# EAGLE board OpenBook_PCB_v54 (EAGLE 9.7.0)
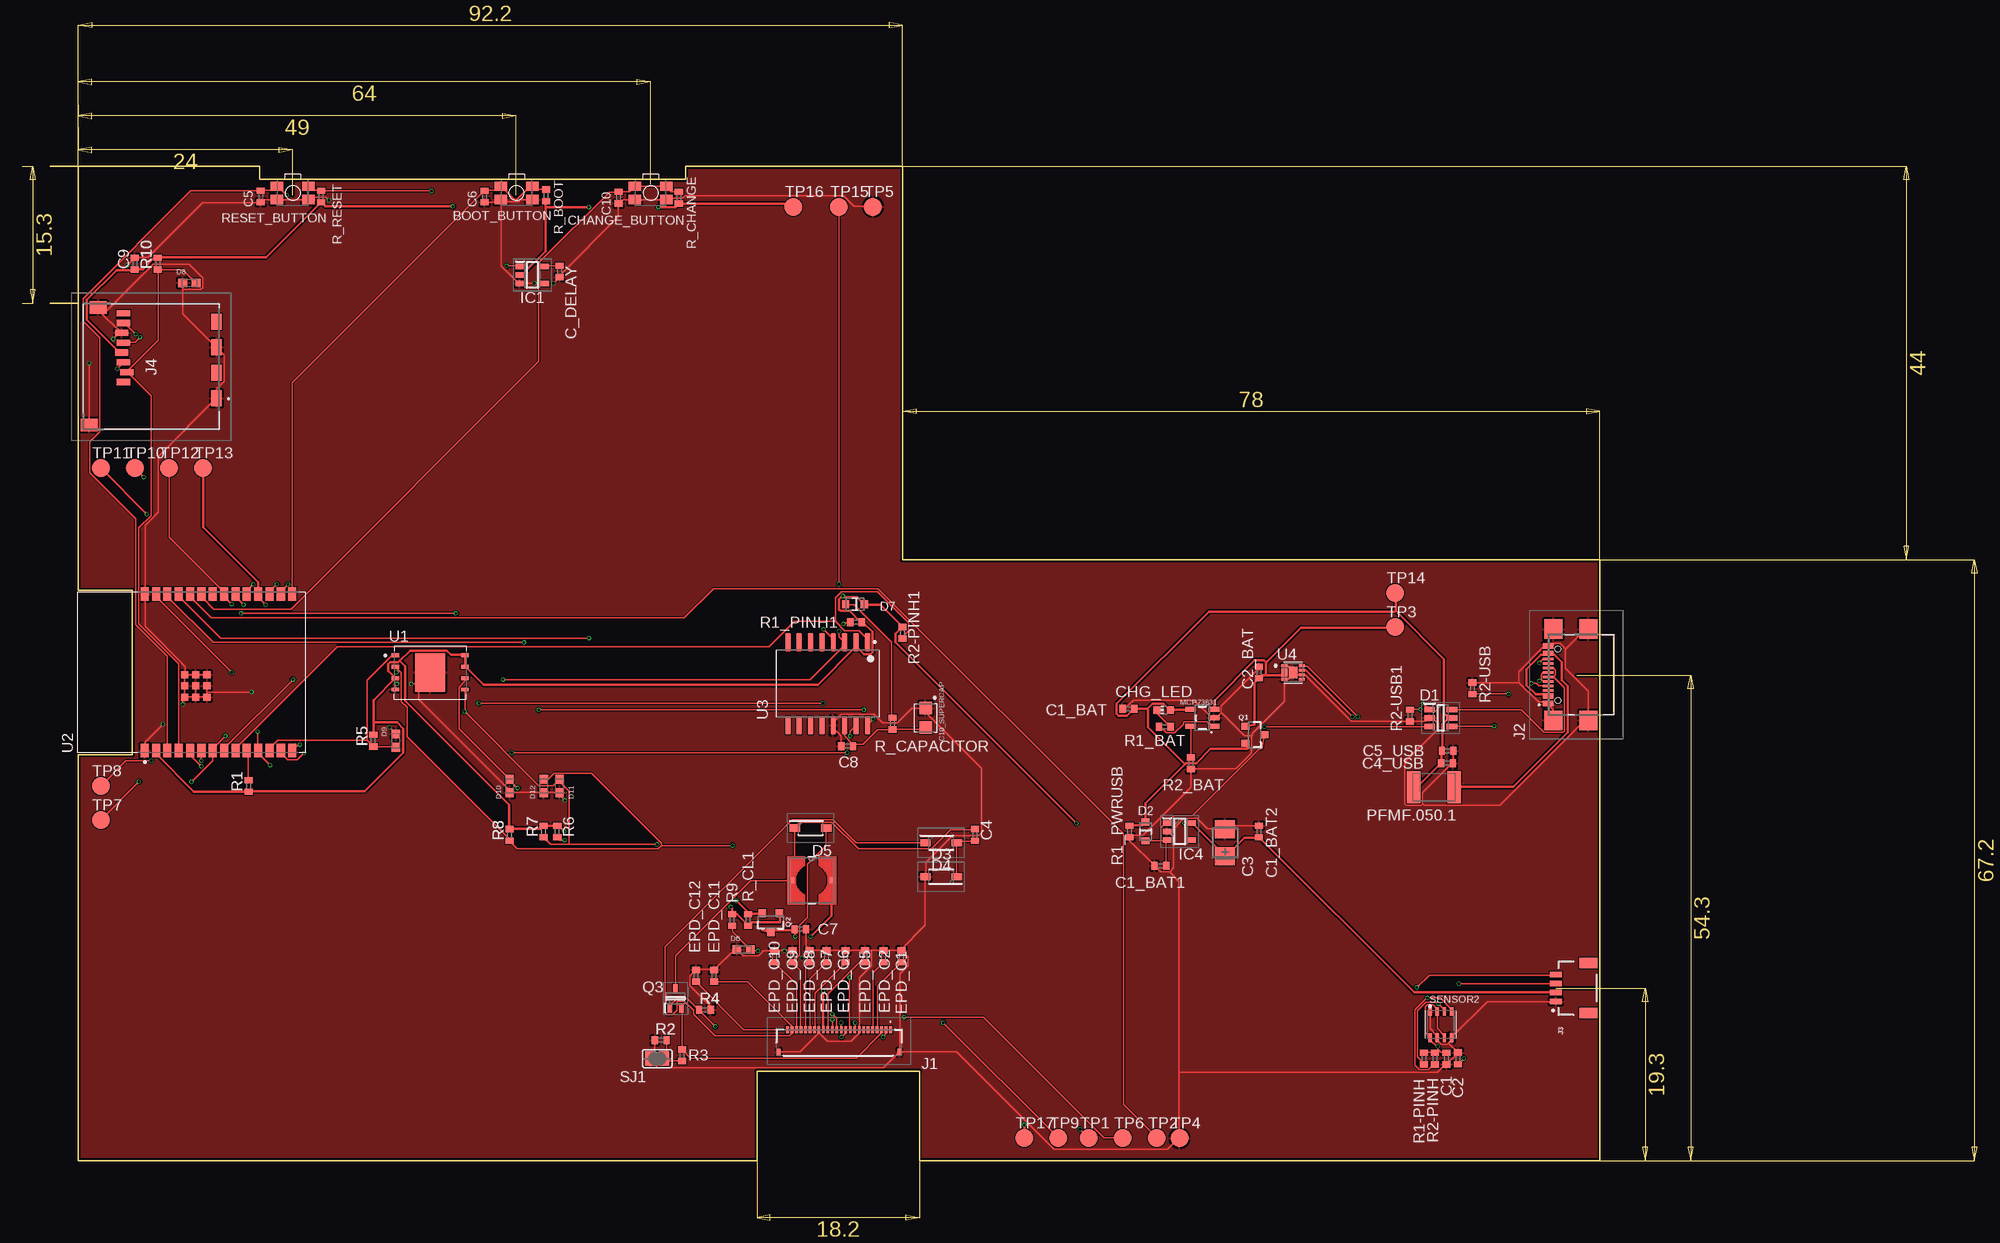
[diagram p0: board, top side]
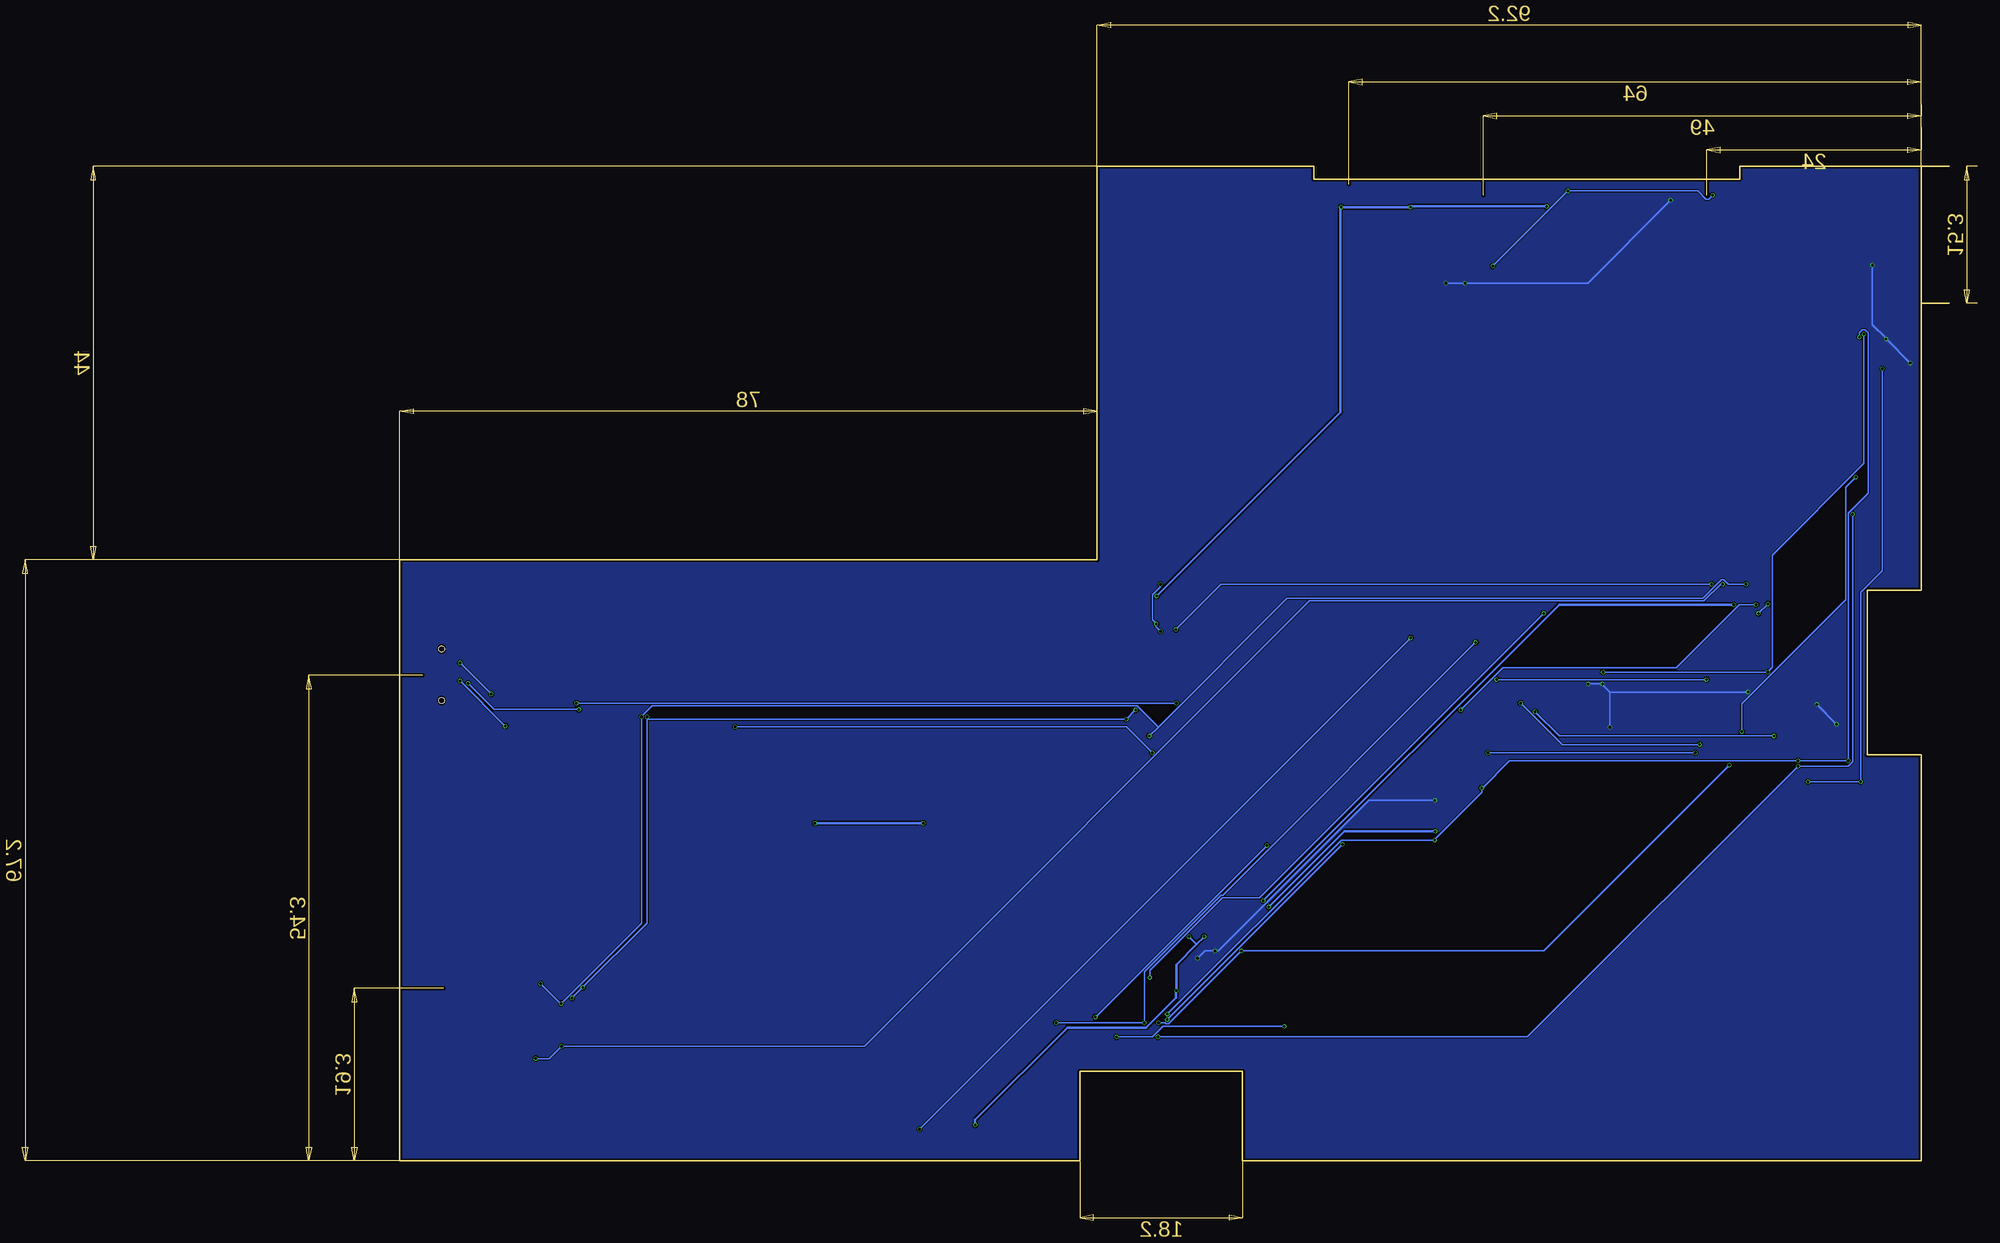
[diagram p1: board, bottom side, seen from below]

Size 173.32 x 111.2 mm. Coordinates in mm from the lower left corner, seen from the top.
Outline: 3.12,111.2 3.12,63.79 9.18,63.79 9.18,45.41 3.12,45.41 3.12,0 79.03,0 79.03,10 97.23,10 97.23,0 173.32,0 173.32,67.2 95.32,67.2 95.32,111.2 71.07,111.2 71.07,109.78 23.45,109.78 23.45,111.2 3.12,111.2
Outline: 0.01,111.2 3.12,111.2
Outline: 0,95.9 3.1,95.9
Copper layers (1*16): Top 0.035mm / dielectric 1.6mm / Bottom 0.035mm
Design rules "jlcpcb-2layers.dru": minimum track width 0.15mm, minimum drill 0.3mm, track to track 5mil, track to pad 5mil, pad to pad 5mil, via to via 5mil, smd to smd 5mil, copper to edge 0.2mm, drill to drill 6mil, minimum pad ring 10mil, minimum via ring 3mil, stop-mask expansion 4mil, vias tented up to drill 0mil, thermal gap 10mil
Net classes: 1 Supply: width 0.3 mm

## Footprints (pad centres in the part's own frame; a part is rotated, then mirrored left to right if it is on the bottom)
MYBUTTON = smd 1.4 x 1.05: 1 1.75,0.75; 2 -1.75,0.75; 3 -1.75,-0.75; 4 1.75,-0.75
ESP32_WROVER_EAGLE-LTSPICE_C0402 = smd 0.7 x 0.9: 1 -0.65,0; 2 0.65,0
RCL_CT3528 = smd 2 x 2.2: + -1.5,0; - 1.5,0
CAPCP3225X100N = smd 1.4 x 1.4: 1 -1.1,0; 2 1.1,0
ADAFRUIT_CHIP-LED0603 = smd 0.8 x 0.8: A 0,-0.75; C 0,0.75
SOT95P280X145-6N = smd 1.2 x 0.6: 1 -1.25,0.95; 2 -1.25,0; 3 -1.25,-0.95; 4 1.25,-0.95; 5 1.25,0; 6 1.25,0.95
ESP32_WROVER_AVX---SD0805S020S1R0_AVX_SD0805S020S1R0_0 = smd 0.8 x 0.9: 1 -1.05,0; 2 1.05,0
SOD3716X135N = smd 1.15 x 0.8: 1 -1.75,0; 2 1.75,0
DIOC1608X36N = smd 0.97 x 0.94: 1 -0.75,0; 2 0.75,0
SOT95P280X125-5N = smd 0.9 x 0.6: 1 -1.4,0.95; 2 -1.4,0; 3 -1.4,-0.95; 4 1.4,-0.95; 5 1.4,0.95
SOT95P280X120-5N = smd 0.9 x 0.6: 1 -1.4,0.95; 2 -1.4,0; 3 -1.4,-0.95; 4 1.4,-0.95; 5 1.4,0.95
FH34SRJ24S05SH99 = smd 0.3 x 0.8: 1 5.75,1.45; 2 5.25,1.45; 3 4.75,1.45; 4 4.25,1.45; 5 3.75,1.45; 6 3.25,1.45; 7 2.75,1.45; 8 2.25,1.45; 9 1.75,1.45; 10 1.25,1.45; 11 0.75,1.45; 12 0.25,1.45; 13 -0.25,1.45; 14 -0.75,1.45; 15 -1.25,1.45; 16 -1.75,1.45; 17 -2.25,1.45; 18 -2.75,1.45; 19 -3.25,1.45; 20 -3.75,1.45; 21 -4.25,1.45; 22 -4.75,1.45; 23 -5.25,1.45; 24 -5.75,1.45 | smd 0.4 x 0.8: MP1 6.75,-1.05; MP2 -6.75,-1.05
SAMACSYS_PARTS_USB4110GFA = smd 0.3 x 1.15: A1 -3.35,3.678; A4 -2.55,3.678; A5 -1.25,3.678; A6 -0.25,3.678; A7 0.25,3.678; A8 1.25,3.678; A9 2.55,3.678; A12 3.35,3.678; B1 3.05,3.678; B4 2.25,3.678; B5 1.75,3.678; B6 0.75,3.678; B7 -0.75,3.678; B8 -1.75,3.678; B9 -2.25,3.678; B12 -3.05,3.678 | smd 2.18 x 2: MP1 -5.11,-0.827; MP2 5.11,-0.827; MP3 -5.11,3.103; MP4 5.11,3.103 | hole 0.65: -2.89,2.603; 2.89,2.603
JST04_1MM_RA = smd 0.6 x 1.35: 1 -1.5,0; 2 -0.5,0; 3 0.5,0; 4 1.5,0 | smd 1.2 x 2: NC1 2.8,-3.675; NC2 -2.8,-3.675
112ATAARR03ATTEND = smd 1.8 x 1.2: G1 10.6,10.4; G2 4.9,10.4; S1 7.75,10.4; S2 2.05,10.4 | smd 1.4 x 1.9: G3 13.6,-3.85; G4 0.45,-2.85 | smd 0.7 x 1.5: P1 8.8,0; P2 7.7,0.4; P3 6.6,0; P4 5.5,-0.2; P5 4.4,0; P6 3.3,-0.2; P7 2.2,0; P8 1.1,0
IND_4828-WE-TPC_WRE = smd 0.635 x 0.635: 1 -2.286,0; 2 2.286,0
ESP32_WROVER_SPARKFUN-IC-POWER_SOT23-5 = smd 0.55 x 1.2: 1 -0.95,-1.3; 2 0,-1.3; 3 0.95,-1.3; 4 0.95,1.3; 5 -0.95,1.3
ESP32C6_VARISTOR_CT/CN1812 = smd 1.5 x 3.6: 1 -2.25,0; 2 2.25,0
ESP32_WROVER_SPARKFUN-DISCRETESEMI_SOT23-3 = smd 0.8 x 0.9: 1 -0.95,-1; 2 0.95,-1; 3 0,1.1
SOT65P210X110-3N = smd 1.05 x 0.5: 1 -1.05,0.65; 2 -1.05,-0.65; 3 1.05,0
ESP32_WROVER_EAGLE-LTSPICE_R0402 = smd 0.7 x 0.9: 1 -0.65,0; 2 0.65,0
ESP32_WROVER_BME680_PSON80P300X300X100-8N = smd 1.016 x 0.5: 1 1.458,1.2; 2 1.458,0.4; 3 1.458,-0.4; 4 1.458,-1.2; 5 -1.458,-1.22; 6 -1.458,-0.4; 7 -1.458,0.4; 8 -1.458,1.2
SJ = smd 1.168 x 1.6: 1 -0.762,0; 2 0.762,0
TP20R = smd 2 x 2: TP 0,0
SON127P600X800X80-9N = smd 0.94 x 0.44: 1 -3.895,1.905; 2 -3.895,0.635; 3 -3.895,-0.635; 4 -3.895,-1.905; 5 3.895,-1.905; 6 3.895,-0.635; 7 3.895,0.635; 8 3.895,1.905 | smd 3.4 x 4.3: 9 0,0
XCVR_ESP32-C6-WROOM-1-N8 = smd 1.5 x 0.9: 1 -8.75,5.26; 2 -8.75,3.99; 3 -8.75,2.72; 4 -8.75,1.45; 5 -8.75,0.18; 6 -8.75,-1.09; 7 -8.75,-2.36; 8 -8.75,-3.63; 9 -8.75,-4.9; 10 -8.75,-6.17; 11 -8.75,-7.44; 12 -8.75,-8.71; 13 -8.75,-9.98; 14 -8.75,-11.25; 15 8.75,-11.25; 16 8.75,-9.98; 17 8.75,-8.71; 18 8.75,-7.44; 19 8.75,-6.17; 20 8.75,-4.9; 21 8.75,-3.63; 22 8.75,-2.36; 23 8.75,-1.09; 24 8.75,0.18; 25 8.75,1.45; 26 8.75,2.72; 27 8.75,3.99; 28 8.75,5.26 | smd 0.8 x 0.8: 29_1 -2.755,0.79; 29_2 -1.505,0.79; 29_3 -0.255,0.79; 29_4 -2.755,-0.46; 29_5 -1.505,-0.46; 29_6 -0.255,-0.46; 29_7 -2.755,-1.71; 29_8 -1.505,-1.71; 29_9 -0.255,-1.71
SOIC127P1032X265-16N = smd 2.05 x 0.59: 1 -4.655,4.445; 2 -4.655,3.175; 3 -4.655,1.905; 4 -4.655,0.635; 5 -4.655,-0.635; 6 -4.655,-1.905; 7 -4.655,-3.175; 8 -4.655,-4.445; 9 4.655,-4.445; 10 4.655,-3.175; 11 4.655,-1.905; 12 4.655,-0.635; 13 4.655,0.635; 14 4.655,1.905; 15 4.655,3.175; 16 4.655,4.445
SON50P200X200X80-9N = smd 0.76 x 0.27: 1 -0.985,0.75; 4 -0.985,-0.75; 5 0.985,-0.75; 6 0.985,-0.25; 7 0.985,0.25; 8 0.985,0.75 | smd 0.76 x 0.422: 2 -0.985,0.25; 3 -0.985,-0.25 | smd 0.9 x 1.3: 9 0,0

## Placement (x,y rotation side)
BOOT_BUTTON  BUTTON_CUSYOMV1  [MYBUTTON]  52.16,108.23 180 top
C1  100nF  [ESP32_WROVER_EAGLE-LTSPICE_C0402]  156.16,11.43 270 top
C1_BAT  4.7uF  [ESP32_WROVER_EAGLE-LTSPICE_C0402]  120.6,50.55 180 top
C1_BAT1  4.7uF  [ESP32_WROVER_EAGLE-LTSPICE_C0402]  124.15,33.02 180 top
C1_BAT2  4.7uF  [ESP32_WROVER_EAGLE-LTSPICE_C0402]  135.2,36.83 90 top
C2  100nF  [ESP32_WROVER_EAGLE-LTSPICE_C0402]  157.43,11.45 90 top
C2_BAT  4.7uF  [ESP32_WROVER_EAGLE-LTSPICE_C0402]  135.2,54.61 90 top
C3  100uF TANT  [RCL_CT3528]  131.39,35.56 90 top
C4  4.7uF/25V  [ESP32_WROVER_EAGLE-LTSPICE_C0402]  103.45,36.45 90 top
C4_USB  100nF  [ESP32_WROVER_EAGLE-LTSPICE_C0402]  156.22,44.45 0 top
C5  1uF  [ESP32_WROVER_EAGLE-LTSPICE_C0402]  23.55,107.82 270 top
C5_USB  4.7uF  [ESP32_WROVER_EAGLE-LTSPICE_C0402]  156.29,45.85 0 top
C6  100nF  [ESP32_WROVER_EAGLE-LTSPICE_C0402]  48.58,107.82 270 top
C7  10uF  [ESP32_WROVER_EAGLE-LTSPICE_C0402]  83.9,25.91 0 top
C8  100nF  [ESP32_WROVER_EAGLE-LTSPICE_C0402]  89.14,46.35 180 top
C9  100nF  [ESP32_WROVER_EAGLE-LTSPICE_C0402]  9.47,100.33 90 top
C10  100nF  [ESP32_WROVER_EAGLE-LTSPICE_C0402]  63.58,107.7 270 top
C10_SUPERCAP  CPH3225A  [CAPCP3225X100N]  97.91,49.53 270 top
C_DELAY  100nF  [ESP32_WROVER_EAGLE-LTSPICE_C0402]  56.97,99.44 270 top
CHANGE_BUTTON  BUTTON_CUSYOMV1  [MYBUTTON]  67.15,108.23 180 top
CHG_LED  [ADAFRUIT_CHIP-LED0603]  124.54,50.42 90 top
D1  USBLC6-2SC6Y  [SOT95P280X145-6N]  155.52,49.53 0 top
D2  ESP32_WROVER_AVX---SD0805S020S1R0_AVX_SD0805S020S1R0_0_0AVX_SD0805S020S1R0_0_0  [ESP32_WROVER_AVX---SD0805S020S1R0_AVX_SD0805S020S1R0_0]  122.5,36.83 270 top
D3  MBR0530"  [SOD3716X135N]  99.64,31.75 180 top
D4  MBR0530"  [SOD3716X135N]  99.64,35.56 0 top
D5  MBR0530"  [SOD3716X135N]  85.04,37.21 0 top
D6  PGB1010603MR"  [DIOC1608X36N]  77.55,23.62 0 top
D7  SD0805S020S1R0  [ESP32_WROVER_AVX---SD0805S020S1R0_AVX_SD0805S020S1R0_0]  89.99,62.23 180 top
D8  PGB1010603MR"  [DIOC1608X36N]  15.57,98.17 0 top
D9  PGB1010603MR"  [DIOC1608X36N]  38.68,46.99 270 top
D10  PGB1010603MR"  [DIOC1608X36N]  51.38,41.91 90 top
D11  PGB1010603MR"  [DIOC1608X36N]  56.97,41.91 90 top
D12  PGB1010603MR"  [DIOC1608X36N]  55.19,41.91 90 top
EPD_C1  1uF/50V  [ESP32_WROVER_EAGLE-LTSPICE_C0402]  95.2,22.86 90 top
EPD_C2  1uF/50V  [ESP32_WROVER_EAGLE-LTSPICE_C0402]  93.18,22.86 90 top
EPD_C5  0.1uF/50V  [ESP32_WROVER_EAGLE-LTSPICE_C0402]  91.13,22.86 90 top
EPD_C6  1uF/50V  [ESP32_WROVER_EAGLE-LTSPICE_C0402]  88.98,22.86 90 top
EPD_C7  1uF/50V  [ESP32_WROVER_EAGLE-LTSPICE_C0402]  86.82,22.86 90 top
EPD_C8  1uF/50V  [ESP32_WROVER_EAGLE-LTSPICE_C0402]  84.91,22.86 90 top
EPD_C9  1uF/50V  [ESP32_WROVER_EAGLE-LTSPICE_C0402]  83.01,22.86 90 top
EPD_C10  1uF/50V  [ESP32_WROVER_EAGLE-LTSPICE_C0402]  80.99,22.86 90 top
EPD_C11  1uF/50V  [ESP32_WROVER_EAGLE-LTSPICE_C0402]  74.24,20.7 90 top
EPD_C12  1uF/50V  [ESP32_WROVER_EAGLE-LTSPICE_C0402]  72.21,20.7 90 top
IC1  BD5229G-TR  [SOT95P280X125-5N]  53.92,99.06 0 top
IC4  XC6220A331MR-G  [SOT95P280X120-5N]  126.31,36.83 0 top
J1  FH34SRJ-24S-0.5SH_99_  [FH34SRJ24S05SH99]  88.22,13.21 0 top
J2  SAMACSYS_PARTS_USB4110-GF-A  [SAMACSYS_PARTS_USB4110GFA]  171.22,54.36 90 top
J3  QWIIC_RIGHT_ANGLE  [JST04_1MM_RA]  168.37,19.32 90 top
J4  112A-TAAR-R03_ATTEND  [112ATAARR03ATTEND]  8.2,95.89 270 top
L1  68uH  [IND_4828-WE-TPC_WRE]  85.17,31.37 0 top
MCP73831  ESP32_WROVER_SPARKFUN-IC-POWER_MCP73831  [ESP32_WROVER_SPARKFUN-IC-POWER_SOT23-5]  128.85,49.53 90 top
PFMF.050.1  ESP32C6_VARISTORCN1812  [ESP32C6_VARISTOR_CT/CN1812]  154.76,41.78 180 top
Q1  20V/4.2A/52mΩ/1.4W  [ESP32_WROVER_SPARKFUN-DISCRETESEMI_SOT23-3]  134.7,47.62 270 top
Q2  20V/4.2A/52mΩ/1.4W  [ESP32_WROVER_SPARKFUN-DISCRETESEMI_SOT23-3]  80.59,26.67 180 top
Q3  SI1308EDL-T1-GE3  [SOT65P210X110-3N]  69.93,18.16 90 top
R1  10K  [ESP32_WROVER_EAGLE-LTSPICE_R0402]  22.17,41.91 90 top
R1-PINH  10K  [ESP32_WROVER_EAGLE-LTSPICE_R0402]  153.62,11.43 90 top
R1_BAT  200  [ESP32_WROVER_EAGLE-LTSPICE_R0402]  124.66,48.51 0 top
R1_PINH1  10K  [ESP32_WROVER_EAGLE-LTSPICE_R0402]  90.12,60.2 0 top
R1_PWRUSB  100K  [ESP32_WROVER_EAGLE-LTSPICE_R0402]  120.73,36.83 90 top
R2  2.2  [ESP32_WROVER_EAGLE-LTSPICE_R0402]  68.27,13.46 0 top
R2-PINH  10K  [ESP32_WROVER_EAGLE-LTSPICE_R0402]  154.89,11.43 90 top
R2-PINH1  10K  [ESP32_WROVER_EAGLE-LTSPICE_R0402]  95.33,59.05 90 top
R2-USB  5k1  [ESP32_WROVER_EAGLE-LTSPICE_R0402]  159.08,52.83 90 top
R2-USB1  5k1  [ESP32_WROVER_EAGLE-LTSPICE_R0402]  152.09,49.78 90 top
R2_BAT  2K  [ESP32_WROVER_EAGLE-LTSPICE_R0402]  127.58,44.45 90 top
R3  0.47  [ESP32_WROVER_EAGLE-LTSPICE_R0402]  70.69,11.81 270 top
R4  10K  [ESP32_WROVER_EAGLE-LTSPICE_R0402]  73.23,16.89 0 top
R5  10K  [ESP32_WROVER_EAGLE-LTSPICE_R0402]  36.14,46.99 90 top
R6  10K  [ESP32_WROVER_EAGLE-LTSPICE_R0402]  56.72,36.83 90 top
R7  10K  [ESP32_WROVER_EAGLE-LTSPICE_R0402]  55.19,36.83 90 top
R8  10K  [ESP32_WROVER_EAGLE-LTSPICE_R0402]  51.38,36.45 90 top
R9  10K  [ESP32_WROVER_EAGLE-LTSPICE_R0402]  76.28,26.92 90 top
R10  10K  [ESP32_WROVER_EAGLE-LTSPICE_R0402]  12.01,100.33 90 top
R_BOOT  10K  [ESP32_WROVER_EAGLE-LTSPICE_R0402]  55.45,107.95 90 top
R_CAPACITOR  15  [ESP32_WROVER_EAGLE-LTSPICE_R0402]  94.18,48.9 90 top
R_CHANGE  10K  [ESP32_WROVER_EAGLE-LTSPICE_R0402]  70.31,107.7 90 top
R_CL1  10K  [ESP32_WROVER_EAGLE-LTSPICE_R0402]  78.05,26.92 90 top
R_RESET  10K  [ESP32_WROVER_EAGLE-LTSPICE_R0402]  30.3,107.82 90 top
RESET_BUTTON  BUTTON_CUSYOMV1  [MYBUTTON]  27.13,108.23 180 top
SENSOR2  BME688  [ESP32_WROVER_BME680_PSON80P300X300X100-8N]  155.52,15.24 90 top
SJ1  [SJ]  67.89,11.43 0 top
TP1  TPTP20R  [TP20R]  116.15,2.54 0 top
TP2  TPTP20R  [TP20R]  123.77,2.54 0 top
TP3  TPTP20R  [TP20R]  150.44,59.69 0 top
TP4  TPTP20R  [TP20R]  126.31,2.54 0 top
TP5  TPTP20R  [TP20R]  92.02,106.68 0 top
TP6  TPTP20R  [TP20R]  119.96,2.54 0 top
TP7  TPTP20R  [TP20R]  5.67,38.1 0 top
TP8  TPTP20R  [TP20R]  5.66,41.91 0 top
TP9  TPTP20R  [TP20R]  112.76,2.54 0 top
TP10  TPTP20R  [TP20R]  9.47,77.47 0 top
TP11  TPTP20R  [TP20R]  5.66,77.47 0 top
TP12  TPTP20R  [TP20R]  13.28,77.47 0 top
TP13  TPTP20R  [TP20R]  17.09,77.47 0 top
TP14  TPTP20R  [TP20R]  150.44,63.5 0 top
TP15  TPTP20R  [TP20R]  88.21,106.68 0 top
TP16  TPTP20R  [TP20R]  83.13,106.68 0 top
TP17  TPTP20R  [TP20R]  108.95,2.54 0 top
U1  W25Q512JVEIQ  [SON127P600X800X80-9N]  42.49,54.61 0 top
U2  ESP32-C6-WROOM-1-N8  [XCVR_ESP32-C6-WROOM-1-N8]  15.82,54.61 90 top
U3  DS3231SN#  [SOIC127P1032X265-16N]  86.94,53.34 270 top
U4  MAX17048G+T10  [SON50P200X200X80-9N]  139.01,54.61 0 top

## Library data of the parts
BOOT_BUTTON C1 C1_BAT C1_BAT1 C1_BAT2 C2 C2_BAT C4 C4_USB C5 C5_USB C6-C10 C_DELAY CHANGE_BUTTON CHG_LED D2-D12 EPD_C1 EPD_C2 EPD_C5-EPD_C12 PFMF.050.1 Q1 Q2 R1 R1-PINH R1_BAT R1_PINH1 R1_PWRUSB R2 R2-PINH R2-PINH1 R2-USB R2-USB1 R2_BAT R3-R10 R_BOOT R_CAPACITOR R_CHANGE R_CL1 R_RESET RESET_BUTTON SJ1 TP1-TP6 TP8-TP17 = DeskAssistant v19 v1
C3 = DeskAssistant v19 v1; SPICEPREFIX: C
C10_SUPERCAP = DeskAssistant v19 v1; AVAILABILITY: Not in stock; CHECK_PRICES: https://www.snapeda.com/parts/CPH3225A/Seiko+Instruments/view-part/?ref=eda; DESCRIPTION: 11 mF (EDLC) Supercapacitor 3.3 V 1210 (3225 Metric) - -; MF: Seiko Instruments; MP: CPH3225A; PACKAGE: 1210 Seiko; PRICE: None; PURCHASE-URL: https://www.snapeda.com/api/url_track_click_mouser/?unipart_id=562593&manufacturer=Seiko Instruments&part_name=CPH3225A&search_term=None; SNAPEDA_LINK: https://www.snapeda.com/parts/CPH3225A/Seiko+Instruments/view-part/?ref=snap
D1 = DeskAssistant v19 v1; AVAILABILITY: In Stock; CHECK_PRICES: https://www.snapeda.com/parts/USBLC6-2SC6Y/STMicroelectronics/view-part/?ref=eda; DESCRIPTION: 17V Clamp 5A (8/20µs) Ipp Tvs Diode Surface Mount SOT-23-6; MF: STMicroelectronics; MP: USBLC6-2SC6Y; PACKAGE: SOT-23-6 STMicroelectronics; PRICE: None; SNAPEDA_LINK: https://www.snapeda.com/parts/USBLC6-2SC6Y/STMicroelectronics/view-part/?ref=snap
IC1 = DeskAssistant v19 v1; DESCRIPTION: Voltage Detector with Adjustable Delay Time: CMOS processes are utilized to develop high precision, low current consumption CMOS reset ICs that allow arbitrary setting of the delay time. The extensive lineup includes both Nch Open Drain and CMOS output types in a wide range of detection voltages (from 2.3V to 6.0V, in 0.1V steps), enabling selection of the ideal solution based on customer requirements. In addition, the entire series is of course both lead-free and RoHS-compliant.; HEIGHT: 1.25mm; MANUFACTURER_NAME: ROHM Semiconductor; MANUFACTURER_PART_NUMBER: BD5229G-TR; MOUSER_PART_NUMBER: 755-BD5229G-TR; MOUSER_PRICE-STOCK: https://www.mouser.co.uk/ProductDetail/ROHM-Semiconductor/BD5229G-TR?qs=4kLU8WoGk0vvnhrrYwdszw%3D%3D
IC4 = DeskAssistant v19 v1; DESCRIPTION: LDO Voltage Regulators; HEIGHT: 1.2mm; MANUFACTURER_NAME: Torex; MANUFACTURER_PART_NUMBER: XC6220A331MR-G; MOUSER_PART_NUMBER: 865-XC6220A331MR-G; MOUSER_PRICE-STOCK: https://www.mouser.co.uk/ProductDetail/Torex-Semiconductor/XC6220A331MR-G?qs=AsjdqWjXhJ8ZSWznL1J0gg%3D%3D
J1 = DeskAssistant v19 v1; DESCRIPTION: 24 Position FFC, FPC Connector Contacts, Top and Bottom 0.020" (0.50mm) Surface Mount, Right Angle; HEIGHT: 1.1mm; MANUFACTURER_NAME: Hirose; MANUFACTURER_PART_NUMBER: FH34SRJ-24S-0.5SH(99); MOUSER_PART_NUMBER: 798-FH34SRJ24S05SH99; MOUSER_PRICE-STOCK: https://www.mouser.co.uk/ProductDetail/Hirose-Connector/FH34SRJ-24S-0.5SH99?qs=vcbW%252B4%252BSTIpKBl5ap9J8Fw%3D%3D
J2 = DeskAssistant v19 v1; DESCRIPTION: CONN USB 2.0 TYPE-C R/A SMT; HEIGHT: 3.26mm; MANUFACTURER_NAME: GCT (GLOBAL CONNECTOR TECHNOLOGY); MANUFACTURER_PART_NUMBER: USB4110-GF-A; MOUSER_PART_NUMBER: 640-USB4110-GF-A; MOUSER_PRICE-STOCK: https://www.mouser.co.uk/ProductDetail/GCT/USB4110-GF-A?qs=KUoIvG%2F9IlYiZvIXQjyJeA%3D%3D
J3 = DeskAssistant v19 v1; PROD_ID: CONN-13694
J4 = DeskAssistant v19 v1; DESCRIPTION: Micro SD Card Socket, Push-Push Type, Top Mount, SMT, H=1.83mm, 10u; HEIGHT: 1.9mm; MANUFACTURER_NAME: ATTEND; MANUFACTURER_PART_NUMBER: 112A-TAAR-R03 ATTEND
L1 = DeskAssistant v19 v1; COPYRIGHT: Copyright (C) 2024 Ultra Librarian. All rights reserved.; MANUFACTURER_PART_NUMBER: 744043680; MFR_NAME: Wurth Electronics
MCP73831 = DeskAssistant v19 v1; PROD_ID: IC-09995
Q3 = DeskAssistant v19 v1; AVAILABILITY: In Stock; CHECK_PRICES: https://www.snapeda.com/parts/SI1308EDL-T1-GE3/Vishay+Siliconix/view-part/?ref=eda; DESCRIPTION: Si1308EDL-T1-GE3 N-channel MOSFET Transistor, 1.5 A, 30 V, 3-Pin SC-70 | Siliconix / Vishay SI1308EDL-T1-GE3; MF: Vishay Siliconix; MP: SI1308EDL-T1-GE3; PACKAGE: SOT-323 Vishay Semiconductor; PRICE: None; PURCHASE-URL: https://www.snapeda.com/api/url_track_click_mouser/?unipart_id=274603&manufacturer=Vishay Siliconix&part_name=SI1308EDL-T1-GE3&search_term=None; SNAPEDA_LINK: https://www.snapeda.com/parts/SI1308EDL-T1-GE3/Vishay+Siliconix/view-part/?ref=snap
SENSOR2 = DeskAssistant v19 v1; AVAILABILITY: Unavailable; DESCRIPTION: Integrated Environmental Unit; MF: Bosch Sensortec; MP: BME680; PACKAGE: LGA-8 Bosch Tools; PRICE: None
TP7 = DeskAssistant v19 v1; SPICEPREFIX: X
U1 = DeskAssistant v19 v1; AVAILABILITY: In Stock; CHECK_PRICES: https://www.snapeda.com/parts/W25Q512JVEIQ/Winbond+Electronics/view-part/?ref=eda; DESCRIPTION: FLASH - NOR Memory IC 512Mb (64M x 8) SPI - Quad I/O 133 MHz 8-WSON (8x6); MF: Winbond Electronics; MP: W25Q512JVEIQ; PACKAGE: Package; PRICE: None; SNAPEDA_LINK: https://www.snapeda.com/parts/W25Q512JVEIQ/Winbond+Electronics/view-part/?ref=snap
U2 = DeskAssistant v19 v1; AVAILABILITY: In Stock; CHECK_PRICES: https://www.snapeda.com/parts/ESP32-C6-WROOM-1-N8/Espressif+Systems/view-part/?ref=eda; DESCRIPTION: Multiprotocol Modules ESP32-C6 module, Wi-Fi 6 in 2.4 GHz band, Bluetooth 5, Zigbee 3.0 and Thread. ESP34-WROOM Compatible - ENGINEERING SAMPLE; MF: Espressif Systems; MP: ESP32-C6-WROOM-1-N8; PACKAGE: None; PRICE: None; SNAPEDA_LINK: https://www.snapeda.com/parts/ESP32-C6-WROOM-1-N8/Espressif+Systems/view-part/?ref=snap
U3 = DeskAssistant v19 v1; AVAILABILITY: In Stock; CHECK_PRICES: https://www.snapeda.com/parts/DS3231SN%23/Analog+Devices/view-part/?ref=eda; DESCRIPTION: Extremely Accurate I²C-Integrated RTC/TCXO/Crystal; MF: Analog Devices; MP: DS3231SN#; PACKAGE: SOIC-16 Maxim; PRICE: None; PURCHASE-URL: https://www.snapeda.com/api/url_track_click_mouser/?unipart_id=99048&manufacturer=Analog Devices&part_name=DS3231SN#&search_term=None; SNAPEDA_LINK: https://www.snapeda.com/parts/DS3231SN%23/Analog+Devices/view-part/?ref=snap
U4 = DeskAssistant v19 v1; AVAILABILITY: In Stock; CHECK_PRICES: https://www.snapeda.com/parts/MAX17048G+T10/Analog+Devices/view-part/?ref=eda; DESCRIPTION: 3µA 1-Cell/2-Cell Fuel Gauge with ModelGauge; MF: Analog Devices; MP: MAX17048G+T10; PACKAGE: TDFN-8 Maxim; PRICE: None; PURCHASE-URL: https://www.snapeda.com/api/url_track_click_mouser/?unipart_id=329239&manufacturer=Analog Devices&part_name=MAX17048G+T10&search_term=None; SNAPEDA_LINK: https://www.snapeda.com/parts/MAX17048G+T10/Analog+Devices/view-part/?ref=snap

## Nets
3V3 [Supply]: C1_BAT2.1 C3.+ C9.1 D7.1 IC1.2 IC4.5 J3.2 J4.P4 Q2.1 R1.1 R1_PINH1.2 R2-PINH1.2 R5.2 R6.2 R7.2 R8.2 R9.2 R10.2 R_BOOT.1 R_CHANGE.1 R_CL1.1 R_RESET.1 TP16.TP U1.3 U1.7 U1.8 U2.2 U3.2
32KHZ: R2-PINH1.1 U2.9 U3.1
DN: D1.4 J2.A7 J2.B7
DP: D1.6 J2.A6 J2.B6
EPD_3V3 [Supply]: C7.1 J1.16 L1.2 Q2.3 TP17.TP
EPD_3V3_C [Supply]: Q2.2 R_CL1.2 TP13.TP U2.18
EPD_BUSY: J1.9 TP9.TP U2.26
EPD_CS: D6.2 J1.12 R9.1 TP10.TP U2.11
EPD_DC: J1.11 TP11.TP U2.5
EPD_RST: J1.10 TP12.TP U2.21
FLASH_CS: D9.2 R5.1 U1.1 U2.12
GDR: J1.2 Q3.1 R4.1
GND: BOOT_BUTTON.1 BOOT_BUTTON.2 C1.2 C1_BAT1.2 C1_BAT2.2 C1_BAT.2 C2.2 C2_BAT.2 C3.- C4_USB.2 C5.2 C5_USB.2 C6.2 C7.2 C8.2 C9.2 C10.2 C10_SUPERCAP.1 C_DELAY.2 CHANGE_BUTTON.1 CHANGE_BUTTON.2 D1.2 D3.2 D6.1 D8.1 D9.1 D10.1 D11.1 D12.1 EPD_C1.2 EPD_C2.2 EPD_C5.2 EPD_C6.2 EPD_C7.2 EPD_C8.2 EPD_C9.2 EPD_C10.2 EPD_C11.2 EPD_C12.2 IC1.3 IC4.2 J1.8 J1.17 J1.MP1 J1.MP2 J2.A1 J2.A12 J2.B1 J2.B12 J2.MP1 J2.MP2 J2.MP3 J2.MP4 J3.1 J4.G1 J4.G2 J4.G3 J4.G4 J4.P6 MCP73831.2 R1_PWRUSB.1 R2-USB1.1 R2-USB.2 R2.1 R2_BAT.1 R4.2 RESET_BUTTON.1 RESET_BUTTON.2 SENSOR2.1 SENSOR2.5 SENSOR2.7 SJ1.1 TP4.TP TP5.TP U1.4 U1.9 U2.1 U2.28 U2.29_1 U2.29_2 U2.29_3 U2.29_4 U2.29_5 U2.29_6 U2.29_7 U2.29_8 U2.29_9 U3.13 U4.1 U4.4 U4.6 U4.9
GPIO8: R1.2 U2.10
I2C_PW: C1.1 C2.1 R1-PINH.2 R2-PINH.2 SENSOR2.2 SENSOR2.6 SENSOR2.8 U2.17
INT_RTC: R1_PINH1.1 TP15.TP U2.8 U3.3
IO/BOOT: BOOT_BUTTON.3 BOOT_BUTTON.4 C6.1 R_BOOT.2 U2.15
IO/CHANGE: C10.1 CHANGE_BUTTON.3 CHANGE_BUTTON.4 R_CHANGE.2 U2.23
MISO: D12.2 J4.P7 R8.1 TP6.TP U1.2 U2.27
MOSI: D11.2 J1.14 J4.P3 R7.1 TP7.TP U1.5 U2.7
N$1: J2.A5 R2-USB1.2
N$2: J2.B5 R2-USB.1
N$3: MCP73831.1 R1_BAT.1
N$4: C1_BAT1.1 D2.2 IC4.1 IC4.3 Q1.3
N$5: CHG_LED.C R1_BAT.2
N$6: EPD_C6.1 J1.18
N$7: C_DELAY.1 IC1.5
N$8: C4.1 D3.1 D4.2
N$9: MCP73831.5 R2_BAT.2
N$16: EPD_C1.1 J1.4
N$17: EPD_C2.1 J1.5
N$18: EPD_C5.1 J1.15
N$19: EPD_C8.1 J1.20
N$20: EPD_C7.1 J1.19
N$22: EPD_C10.1 J1.22
N$23: EPD_C12.1 J1.24
N$29: D7.2 R_CAPACITOR.2
PREVGH: D5.2 EPD_C9.1 J1.21
PREVGL: D4.1 EPD_C11.1 J1.23
RESE: J1.3 Q3.2 R3.1
RESE': R2.2 R3.2 SJ1.2
RESET: C5.1 IC1.1 R_RESET.2 RESET_BUTTON.3 RESET_BUTTON.4 U2.3
RTC_RST: U2.16 U3.4
RX: TP2.TP U2.24
SCK: D10.2 J1.13 J4.P5 R6.1 TP8.TP U1.6 U2.6
SCL: J3.4 R2-PINH.1 SENSOR2.4 U2.20 U3.16 U4.7
SDA: J3.3 R1-PINH.1 SENSOR2.3 U2.19 U3.15 U4.8
SRC: C4.2 D5.1 L1.1 Q3.3
SS_SD: D8.2 J4.P2 R10.1 U2.4
TX: TP1.TP U2.25
USB_D+: D1.1 U2.14
USB_D-: D1.3 U2.13
VBAT [Supply]: C2_BAT.1 MCP73831.3 Q1.1 TP3.TP U4.2 U4.3
VBUS [Supply]: C1_BAT.1 C4_USB.1 C5_USB.1 CHG_LED.A D1.5 D2.1 MCP73831.4 PFMF.050.1.2 Q1.2 R1_PWRUSB.2 TP14.TP
VRTC: C8.1 C10_SUPERCAP.2 R_CAPACITOR.1 U3.14
VUSB [Supply]: J2.A4 J2.A9 J2.B4 J2.B9 PFMF.050.1.1

## Tracks (layer width: path | path; a pad name or v marks a point on that pad's centre or on a via)
3V3  (via drill 0.3)
  Top 0.3: 55.41,106.64 55.41,107.27 R_BOOT.1 | 55.41,106.64 55.41,101.73 52.78,99.1 52.57,99.1 IC1.2 | TP16.TP 83.11,106.71 82.83,106.99 70.37,106.99 R_CHANGE.1 70.23,106.92 69.95,106.64 v68.01,106.64 | v60.25,106.64 55.41,106.64 | J4.P4 7.97,90.44 7.69,90.44 4.09,94.04 4.09,96.26 7.42,99.58 9.36,99.58 C9.1 9.49,99.72 10.39,99.72 11.64,100.97 11.99,100.97 R10.2 12.13,101.04 24.18,101.04 30.27,107.13 R_RESET.1 30.41,107.06 30.75,106.71 v45.02,106.71 | J3.2 168.35,18.84 152.56,18.84 135.32,36.08 C1_BAT2.1 135.18,36.15 133.59,36.15 131.58,34.14 C3.+ 131.44,34.07 127.77,37.74 IC4.5 127.57,37.81 126.94,37.81 v126.87,37.74 | U2.2 11.85,45.84 11.85,45.5 16.07,41.27 22.17,41.27 R1.1 22.31,41.34 35.19,41.34 39.48,45.64 39.48,48.34 38.79,49.03 36.16,49.03 | 88.65,63.02 90.24,63.02 90.93,62.33 D7.1 91.07,62.19 92.87,62.19 95.3,59.76 R2-PINH1.2 95.23,59.62 94.53,58.93 94.53,57.96 v114.75,37.74 | 88.65,63.02 88.44,63.02 88.23,62.81 88.23,61.63 88.37,61.49 89.41,61.49 90.66,60.25 R1_PINH1.2 90.79,60.18 90.93,60.18 91.97,59.14 91.97,56.85 91.76,56.65 91,56.65 90.17,57.48 90.17,57.96 U3.2 90.03,57.41 85.88,53.25 48.48,53.25 46.54,55.19 U1.7 46.4,55.26 46.4,56.51 U1.8 46.27,56.58 44.81,56.58 44.33,57.06 40.24,57.06 39.1,55.92 | Q2.1 81.65,26.66 78.47,26.66 78.19,26.38 R_CL1.1 78.05,26.32 76.81,27.56 76.32,27.56 R9.2 76.25,27.7 76.25,28.25 v76.11,28.39 | 36.16,49.03 36.16,51.52 38.58,53.95 U1.3 38.51,54.08 37.82,54.78 37.82,55.54 38.03,55.75 38.93,55.75 39.1,55.92 | 36.16,49.03 36.16,47.64 R5.2 | 39.1,55.92 39.69,55.33 39.69,51.45 51.32,39.82 51.32,37.26 R8.2 51.39,37.12 54.78,37.12 55.13,37.46 R7.2 55.34,37.46 56.65,37.46 R6.2 56.86,37.46 v57.48,36.84
  Top 0.3: v88.65,63.16 88.65,63.02
  Bottom 0.3: v45.02,106.71 60.12,106.71 v60.25,106.64 v68.01,106.64 68.08,106.51 68.08,83.72 v88.65,63.16 | v76.11,28.39 67.66,36.84 v57.48,36.84 | v114.75,37.74 v126.87,37.74
32KHZ
  Top 0.15: 87.82,60.32 87.82,62.95 88.51,63.64 92.53,63.64 95.99,60.18 95.99,59.28 95.36,58.66 95.36,58.45 R2-PINH1.1 | 87.82,60.32 88.85,59.28 90.45,59.28 91.35,58.38 91.35,58.03 U3.1 | 87.82,60.32 83.25,60.32 80.41,57.48 32.07,57.48 20.78,46.19 20.78,45.91 U2.9
DN  (via drill 0.3)
  Top 0.15: 166.76,53.81 166.9,53.67 167.52,53.67 J2.B7 | 166.76,53.81 166.76,54.36 166.97,54.57 167.52,54.57 J2.A7 | v161.5,48.61 156.79,48.61 D1.4 | v166.55,53.67 166.69,53.81 166.76,53.81
  Bottom 0.15: v166.55,53.67 v161.5,48.61
DP
  Top 0.15: 168.15,54.15 167.59,54.15 J2.A6 | 168.15,54.15 168.35,54.36 168.35,54.85 168.15,55.05 167.59,55.05 J2.B6 | D1.6 156.79,50.41 164.55,50.41 167.04,47.92 169.18,47.92 169.32,48.06 169.32,52.91 168.15,54.08 168.15,54.15
EPD_3V3  (via drill 0.3)
  Top 0.3: v86.43,19.04 86.43,14.68 J1.16 | v83.32,25.07 83.32,25.83 C7.1 83.18,25.76 79.64,25.76 Q2.3 | v108.94,4.02 108.94,2.56 TP17.TP | v85.05,25.07 87.4,27.42 87.4,31.3 L1.2
  Bottom 0.3: v83.32,25.07 84.18,24.2 | 84.18,24.2 86.43,21.95 v86.43,19.04 86.5,18.91 86.5,18.21 89.82,14.89 98.62,14.89 108.94,4.57 v108.94,4.02 | 84.18,24.2 v85.05,25.07
EPD_3V3_C  (via drill 0.3)
  Top 0.3: Q2.2 79.58,27.63 78.12,27.63 R_CL1.2 78.05,27.77 v76.74,29.09 | v24.11,62.19 23.28,63.02 23.28,63.29 U2.18 23.28,63.5 23.28,64.68 17.11,70.84 17.11,77.42 TP13.TP
  Bottom 0.3: v76.74,29.09 43.63,62.19 v24.11,62.19
EPD_BUSY  (via drill 0.3)
  Top 0.15: v90.03,15.44 90.03,14.68 J1.9 | v99.87,15.44 112.75,2.56 TP9.TP | v52.98,57.96 18.22,57.96 13.16,63.02 13.16,63.29 U2.26
  Bottom 0.15: v99.87,15.44 v90.03,15.44 90.03,21.12 81.45,29.71 81.24,29.71 v52.98,57.96
EPD_CS  (via drill 0.3)
  Top 0.15: v88.44,15.44 88.44,14.68 J1.12 | v79.16,23.48 78.47,23.48 78.33,23.61 D6.2 78.26,23.68 76.32,25.62 76.32,26.25 R9.1 | v23.21,47.99 23.21,45.91 U2.11 23.28,45.84 23.28,45.57 v24.59,44.25 | v10.46,76.45 9.49,77.42 TP10.TP
  Bottom 0.15: v88.44,15.44 87.75,15.44 87.61,15.3 87.33,15.3 v79.16,23.48 45.37,23.48 v24.59,44.25 | v23.21,47.99 23.21,51.11 11.57,62.74 11.57,75.34 v10.46,76.45
EPD_DC  (via drill 0.3)
  Top 0.15: v88.51,13.85 88.92,14.27 88.92,14.61 J1.11 | v16.9,44.11 15.66,45.36 15.66,45.84 U2.5 | v10.81,72.3 5.69,77.42 TP11.TP
  Bottom 0.15: v88.51,13.85 47.17,13.85 v16.9,44.11 11.29,44.11 10.81,44.6 v10.81,72.3
EPD_RST  (via drill 0.3)
  Top 0.15: v89.41,20.5 89.41,14.68 J1.10 | v21.34,61.22 v45.37,61.22 | v20.3,62.26 19.47,63.09 19.47,63.29 U2.21 19.47,63.43 19.47,63.57 13.3,69.73 13.3,77.42 TP12.TP
  Bottom 0.15: v89.41,20.5 89.41,21.33 81.31,29.43 77.15,29.43 v45.37,61.22 | v20.3,62.26 v21.34,61.22
FLASH_CS
  Top 0.15: D9.2 38.65,46.26 38.58,46.33 36.16,46.33 R5.1 36.09,46.4 35.46,47.02 | 35.46,47.02 35.46,53.74 38.23,56.51 38.58,56.51 U1.1 | 35.46,47.02 25.42,47.02 24.59,46.19 24.59,45.91 U2.12
GDR  (via drill 0.3)
  Top 0.15: v93.15,13.85 93.43,14.13 93.43,14.61 J1.2 | v74.38,15.03 72.58,16.83 R4.1 72.51,16.9 71.27,18.14 70.09,18.14 69.33,17.38 69.33,17.17 Q3.1
  Bottom 0.15: v93.15,13.85 89.13,13.85 87.95,15.03 v74.38,15.03
GND  (via drill 0.3)
  Top 0.15: BOOT_BUTTON.1 50.42,100.07 52.36,98.13 52.5,98.13 IC1.3 52.57,98.13 v54.16,98.13 | C6.2 48.62,107.2 50.35,107.2 BOOT_BUTTON.1 | BOOT_BUTTON.2 53.88,107.48 52.57,107.48 52.36,107.27 50.49,107.27 BOOT_BUTTON.1 | TP5.TP 91.97,106.71 89.89,106.71 88.72,107.89 70.99,107.89 70.71,107.61 68.98,107.61 68.91,107.55 CHANGE_BUTTON.2 68.84,107.48 65.45,107.48 CHANGE_BUTTON.1 65.38,107.48 64.06,107.48 63.65,107.06 C10.2 63.51,106.99 63.51,105.54 57,99.03 57,98.82 C_DELAY.2 56.93,98.75 v56.31,98.13 | v38.79,53.32 38.65,53.18 38.65,52.77 U1.4 | v40.38,53.32 41.21,53.32 42.46,54.57 U1.9 41.21,53.25 41.21,51.59 51.39,41.41 51.39,41.27 D10.1 51.39,41.2 55.13,41.2 D12.1 55.2,41.2 56.93,41.2 D11.1 57,41.13 57,40.86 v57.55,40.3 | v37.96,48.48 38.65,47.78 D9.1 | U2.29_1 15.03,51.87 15.03,53.05 U2.29_2 15.03,53.12 15.03,54.29 U2.29_3 | U2.29_4 16.28,51.87 15.1,51.87 U2.29_1 | U2.29_5 16.28,53.05 16.28,51.94 U2.29_4 | U2.29_3 15.1,54.36 U2.29_6 16.35,54.36 U2.29_9 | U2.29_4 16.35,51.87 17.53,51.87 U2.29_7 17.53,51.94 17.53,52.42 | 17.53,52.42 17.53,53.05 U2.29_8 | v12.61,48.82 10.6,46.81 10.6,45.91 U2.1 | v14.83,51.04 14.83,51.66 14.97,51.8 U2.29_1 | U2.29_3 15.1,54.43 15.1,55.26 10.6,59.76 10.6,63.29 U2.28 10.6,63.36 10.6,71.05 12.06,72.5 12.06,78.74 18.57,85.25 J4.G1 18.64,85.32 18.64,86.36 19.47,87.19 19.47,90.09 18.64,90.92 J4.G2 18.57,91 14.83,94.73 14.83,97.44 | 14.83,97.44 14.83,98.13 D8.1 | 5.86,94.63 5.41,95.08 5.41,95.43 J4.G4 | 5.86,94.63 7.42,93.07 7.49,93.07 7.97,92.59 J4.P6 7.83,92.66 v7.07,91.89 | v4.37,89.19 4.37,82.34 J4.G3 | 14.83,97.44 16.83,97.44 17.04,97.64 17.04,98.75 15.52,100.27 11.5,100.27 5.86,94.63
  Top 0.15: v8.59,100.14 9.43,100.97 C9.2 9.49,101.04 10.95,101.04 17.04,107.13 23.48,107.13 C5.2 23.62,107.2 23.9,107.48 25.35,107.48 RESET_BUTTON.1 25.42,107.48 28.82,107.48 RESET_BUTTON.2 28.88,107.55 29.09,107.75 30.82,107.75 v31.17,107.41 | 17.53,52.42 v22.51,52.42 | 82.14,23.55 82.97,23.55 EPD_C9.2 | 82.14,23.55 81.03,23.55 EPD_C10.2 80.96,23.48 79.78,23.48 79.23,22.92 77.5,22.92 76.81,23.61 D6.1 76.74,23.61 76.53,23.61 74.31,21.4 EPD_C11.2 74.24,21.4 72.24,21.4 EPD_C12.2 72.17,21.33 71.54,20.71 71.54,19.6 73.83,17.31 73.83,16.9 R4.2 | C8.2 88.44,46.4 88.44,47.51 87.61,48.34 87.61,48.68 U3.13 87.61,48.75 87.61,49.03 88.51,49.93 92.11,49.93 93.08,48.96 94.74,48.96 96.4,50.62 97.86,50.62 C10_SUPERCAP.1 97.86,50.55 97.86,50.21 104.16,43.9 104.16,36.7 103.81,36.36 100.9,36.36 97.93,33.38 97.93,31.79 D3.2 97.86,31.72 97.86,26.32 95.16,23.61 EPD_C1.2 | J1.MP2 81.51,12.19 83.87,12.19 85.95,14.27 85.95,14.61 J1.17 86.02,14.27 86.92,13.37 89.55,13.37 90.45,14.27 90.45,14.61 J1.8 90.52,14.68 90.52,20.5 91.83,21.81 91.83,23.55 | EPD_C8.2 84.98,23.55 86.78,23.55 EPD_C7.2 86.85,23.55 88.92,23.55 EPD_C6.2 88.99,23.55 91.07,23.55 EPD_C5.2 91.14,23.55 91.83,23.55 | C7.2 84.56,25.9 84.56,24.03 84.98,23.61 EPD_C8.2 | R2.1 67.6,13.43 67.6,11.91 67.18,11.49 SJ1.1 67.11,11.36 67.8,10.66 67.8,10.6 68.01,10.39 93.22,10.39 94.95,12.12 J1.MP1 | J1.MP1 95.02,12.19 95.02,20.91 95.92,21.81 95.92,22.78 95.23,23.48 EPD_C1.2 | EPD_C1.2 95.16,23.55 93.22,23.55 EPD_C2.2 93.15,23.55 91.83,23.55 | v84.08,22.64 84.91,23.48 EPD_C8.2 | v82.14,23.48 82.14,23.55
  Top 0.15: 164.27,53.46 159.14,53.46 R2-USB.2 | 164.27,53.46 166.42,51.31 167.52,51.31 J2.B12 167.52,51.24 167.52,51.04 J2.A1 167.59,50.97 168.08,50.48 168.08,49.31 J2.MP3 | 167.59,57.89 167.59,58.93 168.08,59.42 J2.MP4 | 167.59,57.89 167.59,57.76 J2.A12 167.52,57.69 167.52,57.41 J2.B1 167.45,57.41 166.97,57.41 164.27,54.71 164.27,53.46 | 169.46,57.27 169.46,55.05 172.02,52.49 172.02,49.31 J2.MP1 171.96,49.31 171.68,49.31 162.12,39.75 153.67,39.75 153.53,39.89 153.47,39.89 | 169.46,57.27 168.84,57.89 167.59,57.89 | J2.MP2 172.02,59.42 171.68,59.42 169.53,57.27 169.46,57.27 | C5_USB.2 156.93,44.46 C4_USB.2 156.86,44.39 156.72,44.39 153.47,41.13 153.47,39.89 | 153.47,39.89 153.33,39.75 151.66,39.75 151.53,39.89 151.53,44.6 155.13,48.2 155.13,48.96 154.57,49.51 154.3,49.51 D1.2 154.23,49.51 153.88,49.17 152.15,49.17 R2-USB1.1 152.08,49.17 145.5,49.17 140.38,54.29 140.03,54.29 U4.6 139.96,54.36 138.99,54.36 U4.9 | U4.9 138.99,54.57 138.99,54.43 138.44,53.88 138.09,53.88 U4.4 138.02,53.81 138.02,51.38 134.43,47.79 134.43,47.51 134.35,47.51 | U4.1 138.09,55.33 138.44,55.33 138.99,54.78 138.99,54.64 U4.9 | C1_BAT.2 120.02,50.55 120.16,50.55 121.13,51.52 127.91,51.52 129.85,49.58 130.13,49.58 MCP73831.2 130.2,49.58 130.47,49.58 130.96,50.07 | 130.96,50.07 130.96,50.83 135.18,55.05 135.18,55.19 C2_BAT.2 | 134.35,47.51 133.59,47.51 131.03,50.07 130.96,50.07 | 156.37,13.16 156.72,13.5 156.72,13.78 SENSOR2.5 156.79,13.85 160.74,17.8 168.35,17.8 J3.1 | 156.37,13.16 156.24,13.02 155.61,13.02 155.13,13.5 SENSOR2.7 155.06,13.85 155.06,14.06 154.37,14.75 154.37,16.69 SENSOR2.1
  Top 0.15: 156.37,13.16 157.41,12.12 C2.2 157.41,12.05 156.17,10.8 C1.2 156.1,10.73 155.96,10.73 155.13,9.9 126.25,9.9 | C1_BAT2.2 135.18,37.46 131.79,37.46 131.44,37.12 C3.- 131.37,37.12 129.44,37.12 128.26,38.3 126.8,38.3 125.21,36.7 IC4.2 124.93,36.77 125.07,36.77 125.63,36.22 125.63,32.76 125.21,32.34 | 125.21,32.34 124.17,32.34 123.55,32.96 C1_BAT1.2 123.48,33.03 120.78,35.73 120.78,36.15 R1_PWRUSB.1 120.85,36.15 121.13,36.42 122.23,36.42 127.57,41.76 127.57,43.77 R2_BAT.1 127.63,43.84 132.62,43.84 134.35,45.57 134.35,47.51 | 126.25,9.9 126.25,31.23 125.21,32.27 125.21,32.34 | 126.25,9.9 126.25,2.56 TP4.TP 126.18,2.56 124.93,1.32 112.26,1.32 101.39,12.19 95.09,12.19 J1.MP1
  Bottom 0.15: v56.31,98.13 v54.16,98.13 40.45,98.13 v31.17,107.41 | v40.38,53.32 v38.79,53.32 38.79,53.25 37.96,52.42 | 37.96,52.42 v37.96,48.48 | v14.83,51.04 v12.61,48.82 | v4.37,89.19 v7.07,91.89 7.07,91.96 8.59,93.49 v8.59,100.14 | v22.51,52.42 37.96,52.42 | v84.08,22.64 83.25,23.48 v82.14,23.48 81.72,23.48 64.89,40.3 v57.55,40.3
  pour Top: 8.27,46.95 8.25,46.93 8.22,46.91 1.88,46.91 0.66,45.69 0.66,-3.73 175.81,-3.73 177.04,-2.51 177.04,68.55 175.81,69.77 98.36,69.77 98.33,69.79 98.31,69.81 98.3,69.83 98.3,111.68 1.93,111.68 1.93,62.31 8.22,62.31 8.25,62.29 8.27,62.27 8.28,62.25 8.28,46.97
  pour Bottom: 8.27,46.95 8.25,46.93 8.22,46.91 0.66,46.91 0.66,-3.73 175.81,-3.73 177.04,-2.51 177.04,69.77 98.36,69.77 98.33,69.79 98.31,69.81 98.3,69.83 98.3,111.68 1.93,111.68 1.93,62.31 8.22,62.31 8.25,62.29 8.27,62.27 8.28,62.25 8.28,46.97
GPIO8
  Top 0.15: R1.2 22.17,42.59 22.17,45.7 22.03,45.84 U2.10
I2C_PW  (via drill 0.3)
  Top 0.15: SENSOR2.6 155.89,13.85 155.89,14.06 155.13,14.82 SENSOR2.2 155.06,16.76 155.06,17.04 154.64,17.45 154.02,17.45 153.81,17.24 153.81,14.34 154.3,13.85 SENSOR2.8 154.37,13.78 154.37,13.5 155.13,12.74 v155.2,12.81 155.2,12.4 154.92,12.12 R2-PINH.2 | v158.11,11.43 157.48,10.8 C2.1 | R1-PINH.2 153.67,12.12 154.85,12.12 R2-PINH.2 | C1.1 156.1,12.12 155.54,12.12 155.27,12.4 R2-PINH.2 | v25.35,64.47 24.59,63.71 24.59,63.36 U2.17
  Bottom 0.15: v158.11,11.43 156.58,11.43 v155.2,12.81 121.33,12.81 71.54,62.6 27.43,62.6 25.56,64.47 v25.35,64.47
INT_RTC  (via drill 0.3)
  Top 0.15: v88.72,60.04 88.85,60.18 89.41,60.18 R1_PINH1.1 | v88.23,59.21 88.23,58.59 88.79,58.03 U3.3 88.79,57.96 88.79,57.62 84.98,53.81 v50.63,53.81 | v27.15,53.81 19.47,46.12 19.47,45.91 U2.8 | v88.23,64.47 88.23,106.64 TP15.TP
  Bottom 0.15: v88.23,59.21 88.72,59.69 v88.72,60.04 88.72,60.11 89.13,60.52 89.13,63.29 88.23,64.19 v88.23,64.47 | v50.63,53.81 v27.15,53.81
IO/BOOT
  Top 0.15: R_BOOT.2 55.41,108.65 54.23,108.65 53.95,108.93 BOOT_BUTTON.3 53.88,108.93 53.61,108.93 52.22,107.55 51.88,107.55 50.42,109 BOOT_BUTTON.4 50.35,108.93 49.94,108.52 48.62,108.52 C6.1 48.55,108.44 27.08,86.98 U2.15
IO/CHANGE
  Top 0.15: R_CHANGE.2 70.3,108.38 69.46,108.38 68.91,108.93 CHANGE_BUTTON.3 68.84,109 65.45,109 CHANGE_BUTTON.4 65.38,108.93 64.83,108.38 63.58,108.38 C10.1 63.51,108.31 62.54,108.31 54.65,100.41 54.65,89.4 26.95,61.7 18.29,61.7 16.97,63.02 16.97,63.29 U2.23
MISO  (via drill 0.3)
  Top 0.15: 38.96,54.88 38.65,55.19 U1.2 | 38.96,54.88 39.27,54.57 39.27,51.31 39.9,50.69 39.9,47.44 51.32,36.01 51.32,35.8 R8.1 51.39,35.73 52.22,34.9 68.01,34.9 68.36,35.25 | 68.36,35.25 68.36,35.52 60.53,43.35 56.38,43.35 55.75,42.73 55.2,42.73 D12.2 | v20.3,54.64 11.85,63.09 11.85,63.29 U2.27 | 38.96,54.88 v38.72,54.64 | v9.56,92.45 8.39,93.63 8.25,93.63 J4.P7 | v95.5,16.07 104.37,16.07 117.87,2.56 119.95,2.56 TP6.TP | 68.36,35.25 v76.32,35.25
  Bottom 0.15: v38.72,54.64 v20.3,54.64 20.3,54.71 19.81,55.19 19.81,67.73 9.56,77.97 v9.56,92.45 | v76.32,35.25 v95.5,16.07
MOSI  (via drill 0.3)
  Top 0.15: v15.8,42.38 18.15,44.74 18.15,45.84 U2.7 18.22,45.91 18.22,46.12 v19.61,47.51 | v9.91,42.38 5.69,38.16 TP7.TP | v7.49,88.57 8.18,89.26 J4.P3 | 46.4,50.21 U1.5 | 46.4,50.21 54.65,41.97 56.24,41.97 56.93,42.66 D11.2 56.86,42.52 58.04,41.34 58.04,35.39 | v87.47,15.79 87.47,14.68 J1.14 | 58.04,35.39 55.96,35.39 55.2,36.15 R7.1 | 58.04,35.39 v67.87,35.39 | v46.34,50.21 46.4,50.21
  Bottom 0.15: v15.8,42.38 v9.91,42.38 9.91,63.57 7.49,66 v7.49,88.57 | v67.87,35.39 v87.47,15.79 | v19.61,47.51 43.63,47.51 v46.34,50.21
N$1  (via drill 0.3)
  Top 0.15: v153.26,50.48 152.15,50.48 R2-USB1.2 | v165.65,53.39 166.21,53.39 166.48,53.12 167.52,53.12 J2.A5
  Bottom 0.15: v153.26,50.48 162.74,50.48 v165.65,53.39
N$2  (via drill 0.3)
  Top 0.15: v163.09,52.22 159.14,52.22 R2-USB.1 | v166.55,55.68 166.97,56.09 167.52,56.09 J2.B5
  Bottom 0.15: v166.55,55.68 v163.09,52.22
N$3
  Top 0.15: R1_BAT.1 124.03,48.48 124.24,48.48 124.87,47.85 125.77,47.85 126.73,48.82 126.73,48.96 126.87,49.1 129.37,49.1 129.85,48.61 130.13,48.61 MCP73831.1
N$4
  Top 0.15: 124.24,35.8 124.8,35.8 124.87,35.87 IC4.3 124.8,35.73 124.8,33.03 C1_BAT1.1 | 124.24,35.8 122.51,35.8 D2.2 | 124.24,35.8 124.24,37.26 124.73,37.74 124.87,37.74 IC4.1 124.93,37.81 125.7,38.57 127.77,38.57 135.25,46.05 135.5,46.05 Q1.3
N$5
  Top 0.15: CHG_LED.C 123.83,50.41 123.83,50 125.28,48.54 R1_BAT.2
N$6
  Top 0.15: J1.18 85.53,14.68 85.53,18.77 88.92,22.16 EPD_C6.1
N$7
  Top 0.15: IC1.5 55.34,100.07 56.93,100.07 C_DELAY.1
N$8
  Top 0.15: C4.1 103.4,35.73 101.6,35.73 101.46,35.59 D4.2 101.39,35.52 101.39,31.79 D3.1
N$9
  Top 0.15: R2_BAT.2 127.57,45.15 127.57,48.54 MCP73831.5
N$16
  Top 0.15: J1.4 92.53,14.68 92.53,19.53 95.16,22.16 EPD_C1.1
N$17
  Top 0.15: J1.5 92.04,14.68 92.04,21.05 93.15,22.16 EPD_C2.1
N$18
  Top 0.15: J1.15 86.99,14.68 86.99,18.7 90.45,22.16 91.07,22.16 EPD_C5.1
N$19
  Top 0.15: J1.20 84.49,14.68 84.49,21.74 84.91,22.16 EPD_C8.1
N$20
  Top 0.15: J1.19 84.98,14.68 84.98,20.36 86.78,22.16 EPD_C7.1
N$22
  Top 0.15: J1.22 83.45,14.68 83.45,19.74 81.03,22.16 EPD_C10.1
N$23
  Top 0.15: J1.24 82.41,14.68 77.57,14.68 72.24,20.01 EPD_C12.1
N$29
  Top 0.15: D7.2 88.99,62.19 89.89,62.19 94.12,57.96 94.12,49.58 R_CAPACITOR.2
PREVGH
  Top 0.15: J1.21 83.94,14.68 83.94,21.26 83.04,22.16 EPD_C9.1 83.04,22.23 83.8,22.99 83.8,26.32 84.7,27.21 84.7,33.17 86.78,35.25 86.78,37.19 D5.2
PREVGL
  Top 0.15: EPD_C11.1 74.31,20.01 77.98,20.01 82.97,15.03 82.97,14.68 J1.23 82.97,14.61 82.97,14.27 82.69,13.99 74.38,13.99 71.96,16.41 71.96,16.83 70.92,17.87 70.23,17.87 70.09,17.73 70.09,16.83 69.6,16.34 68.98,16.34 68.77,16.55 68.77,23.96 82.97,38.16 87.54,38.16 90.1,35.59 97.86,35.59 D4.1
RESE
  Top 0.15: J1.3 92.94,14.61 92.94,14.27 90.17,11.49 71.61,11.49 70.71,12.4 R3.1 70.64,12.46 70.64,17.11 Q3.2
RESE'
  Top 0.15: R3.2 70.64,11.22 68.91,11.22 68.7,11.43 SJ1.2 68.7,11.49 68.91,11.7 68.91,13.43 R2.2
RESET  (via drill 0.3)
  Top 0.15: RESET_BUTTON.3 28.88,108.93 29.3,108.52 30.27,108.52 R_RESET.2 30.34,108.44 v42.67,108.44 | v51.04,100.07 52.5,100.07 IC1.1 | U2.3 13.1,45.91 13.1,56.44 9.56,59.97 9.56,71.81 4.44,76.94 4.44,80.4 5.55,81.51 5.55,92.03 3.68,93.9 3.68,96.4 15.73,108.44 23.48,108.44 C5.1 23.55,108.52 24.94,108.52 25.35,108.93 RESET_BUTTON.4 25.42,109 v26.46,107.96
  Bottom 0.15: v51.04,100.07 v42.67,108.44 28.12,108.44 27.22,107.55 26.88,107.55 v26.46,107.96
RTC_RST  (via drill 0.3)
  Top 0.15: v26.6,64.47 25.84,63.71 25.84,63.36 U2.16 | v86.5,59.42 87.54,58.38 87.54,58.03 U3.4
  Bottom 0.15: v26.6,64.47 81.45,64.47 v86.5,59.42
RX
  Top 0.15: U2.24 15.66,63.29 15.66,63.09 18.01,60.73 70.92,60.73 74.17,63.99 92.59,63.99 120.02,36.56 120.02,6.3 123.76,2.56 TP2.TP
SCK  (via drill 0.3)
  Top 0.15: v16.9,44.74 16.9,45.84 U2.6 | v11.29,44.74 8.46,44.74 5.69,41.97 TP8.TP | v10.05,92.1 9.49,91.55 8.25,91.55 J4.P5 | U1.6 46.34,53.95 46.34,53.6 45.71,52.98 45.71,48.34 51.32,42.73 D10.2 51.39,42.59 v52.29,41.69 | v87.47,16.41 87.95,15.93 87.95,14.68 J1.13 | v57.55,35.87 57,35.87 56.72,36.15 R6.1
  Bottom 0.15: v10.05,92.1 10.05,92.59 9.7,92.93 9.43,92.93 9.08,92.59 9.08,74.65 11.29,72.44 v11.29,44.74 v16.9,44.74 49.17,44.74 52.22,41.69 v52.29,41.69 52.29,41.2 57.55,35.94 v57.55,35.87 68.01,35.87 v87.47,16.41
SCL  (via drill 0.3)
  Top 0.15: v145.64,49.65 140.45,54.85 140.03,54.85 U4.7 | SENSOR2.4 156.72,16.76 156.72,16.97 155.47,18.21 v154.02,18.21 153.95,18.21 152.63,16.9 152.63,10.66 153.12,10.18 154.16,10.18 154.71,10.73 154.85,10.73 R2-PINH.1 | v152.84,19.39 154.23,20.77 168.35,20.77 J3.4 | v21.61,62.19 20.78,63.02 20.78,63.29 U2.20 | v91,50.41 v54.65,50.41 | v92.04,49.38 91.42,48.75 U3.16
  Bottom 0.15: 145.64,49.38 145.64,26.59 v152.84,19.39 v154.02,18.21 | 145.64,49.38 v145.64,49.65 | v21.61,62.19 23.48,62.19 30.55,55.12 49.94,55.12 v54.65,50.41 | v91,50.41 v92.04,49.38 145.64,49.38
SDA  (via drill 0.3)
  Top 0.15: v146.26,49.65 140.58,55.33 140.03,55.33 U4.8 | SENSOR2.3 155.89,16.76 155.89,16.97 v155.27,17.59 155.2,17.59 155.06,17.73 153.88,17.73 152.91,16.76 152.91,11.63 153.6,10.94 153.6,10.8 R1-PINH.1 | v157.55,19.8 168.35,19.8 J3.3 | v22.72,64.47 22.03,63.78 22.03,63.36 U2.19 | v89.48,47.51 89.48,48.06 90.1,48.68 U3.15
  Bottom 0.15: v157.55,19.8 155.34,17.59 v155.27,17.59 146.26,26.59 v146.26,49.65 146.26,49.72 145.09,50.9 90.86,50.9 88.47,48.51 | v22.72,64.47 24.73,64.47 25.21,64.96 25.49,64.96 27.57,62.88 74.1,62.88 88.47,48.51 | v89.48,47.51 88.47,48.51
SRC
  Top 0.15: C4.2 103.4,37.05 100.7,37.05 98.55,34.9 90.38,34.9 87.4,37.88 83.94,37.88 83.32,37.26 D5.1 83.25,37.19 83.25,31.79 82.9,31.44 L1.1 82.83,31.3 78.33,31.3 69.95,22.92 69.95,19.25 Q3.3
SS_SD
  Top 0.15: D8.2 16.28,98.2 14.83,99.65 12.06,99.65 R10.1 12.06,99.58 12.06,91.76 8.66,88.36 8.66,88.22 J4.P2 8.66,88.16 11.29,85.52 11.29,72.16 9.91,70.77 9.91,60.04 14.34,55.61 14.34,45.91 U2.4
TX  (via drill 0.3)
  Top 0.15: v60.25,58.45 19.05,58.45 14.41,63.09 14.41,63.29 U2.25 | v115.17,3.53 116.14,2.56 TP1.TP
  Bottom 0.15: v115.17,3.53 v60.25,58.45
USB_D+  (via drill 0.3)
  Top 0.15: v153.53,51.18 154.23,50.48 D1.1 | v47.93,51.18 v86.43,51.18 | v27.91,46.54 27.71,46.54 27.08,45.91 U2.14
  Bottom 0.15: v86.43,51.18 v153.53,51.18 | v47.93,51.18 43.29,46.54 v27.91,46.54
USB_D-  (via drill 0.3)
  Top 0.15: v135.81,48.54 154.23,48.54 D1.3 | v51.6,45.64 v89.13,45.64 | v28.4,45.64 27.64,44.87 26.53,44.87 25.84,45.57 25.84,45.84 U2.13
  Bottom 0.15: v135.81,48.54 92.04,48.54 v89.13,45.64 | v28.4,45.64 v51.6,45.64
VBAT
  Top 0.3: U4.2 138.02,54.85 U4.3 137.88,54.29 135.94,54.29 | Q1.1 134.7,48.77 134.7,53.46 135.18,53.95 C2_BAT.1 135.32,54.02 135.6,54.29 135.94,54.29 | 135.94,55.75 135.74,55.95 134.7,55.95 130.2,51.45 130.2,50.48 MCP73831.3 | 135.94,54.29 135.94,55.75 | TP3.TP 150.42,59.62 139.89,59.62 136.08,55.82 135.94,55.75
VBUS
  Top 0.3: MCP73831.4 127.5,50.41 125.35,50.41 CHG_LED.A 125.14,50.48 124.52,51.11 123.27,51.11 122.72,50.55 | 122.72,50.55 121.26,50.55 C1_BAT.1 121.13,50.48 120.43,49.79 119.46,49.79 119.26,50 119.26,51.11 129.57,61.42 150.35,61.42 150.49,61.49 | R1_PWRUSB.2 120.78,37.53 122.1,37.53 122.44,37.88 D2.1 122.51,38.02 122.51,39.96 126.91,44.35 | 126.91,44.35 127.01,44.46 128.19,44.46 129.78,46.05 133.88,46.05 Q1.2 | 126.91,44.35 122.79,48.48 122.79,50.41 122.72,50.55 | 150.49,61.49 150.49,63.43 TP14.TP | 150.49,61.49 155.89,56.09 155.89,50.07 156.3,49.65 D1.5 156.72,49.51 156.37,49.51 155.68,48.82 155.68,45.98 C5_USB.1 155.61,45.84 155.61,44.46 C4_USB.1 155.47,44.39 152.91,41.83 152.56,41.83 PFMF.050.1.2
VRTC
  Top 0.15: C10_SUPERCAP.2 97.86,48.41 97.72,48.27 94.19,48.27 R_CAPACITOR.1 94.12,48.2 92.53,48.2 90.93,46.6 89.82,46.6 C8.1 89.76,46.4 89.76,46.6 88.85,47.51 U3.14
VUSB
  Top 0.3: J2.A4 167.52,51.87 167.52,52.08 J2.B9 167.38,52.15 166.14,52.15 165.1,53.18 165.1,54.98 166.69,56.58 167.38,56.58 J2.B4 | J2.B4 167.52,56.65 167.52,56.85 J2.A9 | J2.B4 167.66,56.58 168.22,56.58 169.05,55.75 169.05,53.74 169.74,53.05 169.74,47.92 163.65,41.83 157.07,41.83 PFMF.050.1.1